# EAGLE board icontroller (EAGLE 5.02)
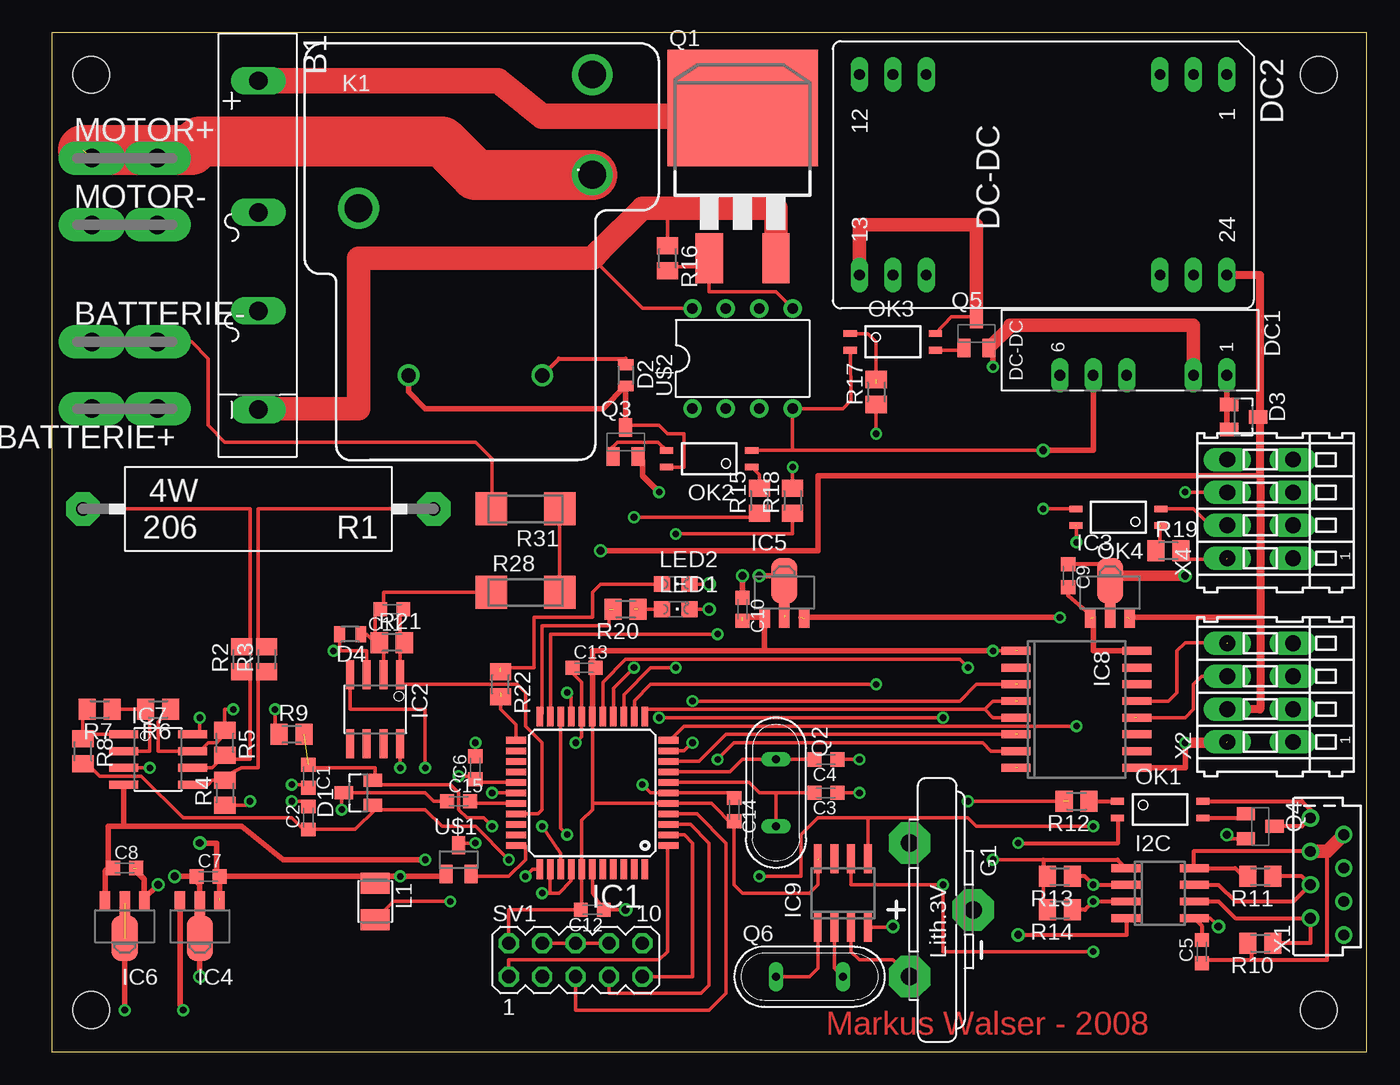
[diagram p0: board, top side]
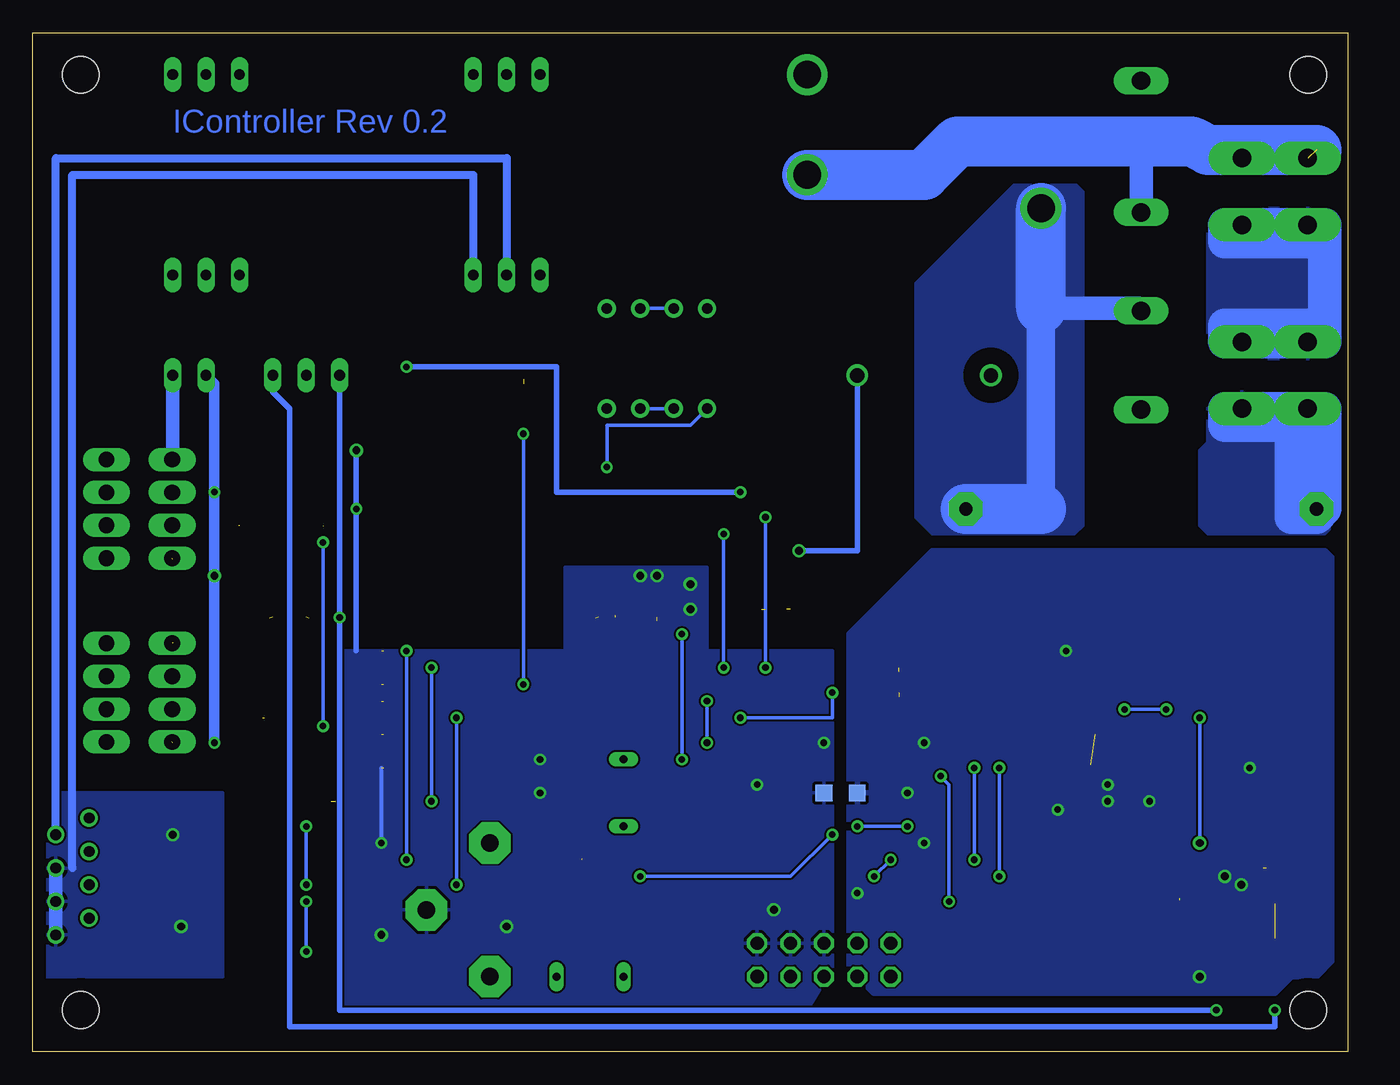
[diagram p1: board, bottom side, seen from below]

Size 100 x 77.46 mm. Coordinates in mm from the lower left corner, seen from the top.
Outline: 0,0 100,0 100,77.46 0,77.46 0,0
Copper layers (1*16): Top 0.035mm / dielectric 1.5mm / Bottom 0.035mm
Design rules "default": minimum track width 10mil, minimum drill 24mil, track to track 6mil, track to pad 6mil, pad to pad 6mil, via to via 6mil, smd to smd 6mil, copper to edge 40mil, drill to drill 8mil, minimum pad ring 10mil, minimum via ring 8mil, stop-mask expansion 4mil, vias tented up to drill 25mil, thermal gap 10mil
Holes 2.8 mm at 96.36,3.17 3.01,3.17 96.36,74.29 3.01,74.29

## Footprints (pad centres in the part's own frame; a part is rotated, then mirrored left to right if it is on the bottom)
FB32 = drill 1.397 long: + -13.5,0; - 11.494,0; AC1 -3.492,0; AC2 4.001,0
F061.100 = drill 1.4 pad 2.54 long: A1 -2.5,0; A2 2.5,0
C0603K = smd 1.05 x 1.08: 1 -0.875,0; 2 0.875,0
SOT23 = smd 1 x 1.4: 1 -0.95,-1.1; 2 0.95,-1.1; 3 0,1.1
MICROMELF-R = smd 0.8 x 1.2: A 0.8,0; C -0.8,0
NMA = drill 0.813 long: 1 0,6.35; 2 0,3.81; 4 0,-1.27; 5 0,-3.81; 6 0,-6.35
DCW = drill 0.813 long: 1 -7.62,13.97; 2 -7.62,11.43; 3 -7.62,8.89; 10 -7.62,-8.89; 11 -7.62,-11.43; 12 -7.62,-13.97; 13 7.62,-13.97; 14 7.62,-11.43; 15 7.62,-8.89; 22 7.62,8.89; 23 7.62,11.43; 24 7.62,13.97
CR2032V = drill 1.321 pad 3.15 octagon: + -2.54,-5.08; +@1 -2.54,5.08; - 2.286,0
SO8 = smd 0.6 x 2.2: 1 -1.905,-2.6; 2 -0.635,-2.6; 3 0.635,-2.6; 4 1.905,-2.6; 5 1.905,2.6; 6 0.635,2.6; 7 -0.635,2.6; 8 -1.905,2.6
TQFP44 = smd 1.5 x 0.5: 1 -5.8,4; 2 -5.8,3.2; 3 -5.8,2.4; 4 -5.8,1.6; 5 -5.8,0.8; 6 -5.8,0; 7 -5.8,-0.8; 8 -5.8,-1.6; 9 -5.8,-2.4; 10 -5.8,-3.2; 11 -5.8,-4; 23 5.8,-4; 24 5.8,-3.2; 25 5.8,-2.4; 26 5.8,-1.6; 27 5.8,-0.8; 28 5.8,0; 29 5.8,0.8; 30 5.8,1.6; 31 5.8,2.4; 32 5.8,3.2; 33 5.8,4 | smd 0.5 x 1.5: 12 -4,-5.8; 13 -3.2,-5.8; 14 -2.4,-5.8; 15 -1.6,-5.8; 16 -0.8,-5.8; 17 0,-5.8; 18 0.8,-5.8; 19 1.6,-5.8; 20 2.4,-5.8; 21 3.2,-5.8; 22 4,-5.8; 34 4,5.8; 35 3.2,5.8; 36 2.4,5.8; 37 1.6,5.8; 38 0.8,5.8; 39 0,5.8; 40 -0.8,5.8; 41 -1.6,5.8; 42 -2.4,5.8; 43 -3.2,5.8; 44 -4,5.8
SO08 = smd 0.61 x 2.21: 1 -1.905,-2.616; 2 -0.635,-2.616; 3 0.635,-2.616; 4 1.905,-2.616; 5 1.905,2.616; 6 0.635,2.616; 7 -0.635,2.616; 8 -1.905,2.616
SOT89 = smd 0.8 x 1.4: 1 -1.499,-1.981; 3 1.499,-1.981 | smd 0.8 x 1.9: 2 0,-1.727 | smd 2 x 3.5: 2.1 0,0.889
SO16W = smd 0.6 x 2.2: 1 -4.445,-4.6; 2 -3.175,-4.6; 3 -1.905,-4.6; 4 -0.635,-4.6; 5 0.635,-4.6; 6 1.905,-4.6; 7 3.175,-4.6; 8 4.445,-4.6; 9 4.445,4.6; 10 3.175,4.6; 11 1.905,4.6; 12 0.635,4.6; 13 -0.635,4.6; 14 -1.905,4.6; 15 -3.175,4.6; 16 -4.445,4.6
SO08' = smd 0.6 x 2.2: 1 -1.905,-2.6; 2 -0.635,-2.6; 3 0.635,-2.6; 4 1.905,-2.6; 5 1.905,2.6; 6 0.635,2.6; 7 -0.635,2.6; 8 -1.905,2.6
JT-PCB = drill 1.1 round: 1 5.08,0; 2 -5.08,0 | drill 2.1 round: C -8.89,12.7; NC 8.89,22.86; NO 8.89,15.24
L3225M = smd 1.6 x 2.2: 1 -1.4,0; 2 1.4,0
CHIPLED_0805 = smd 1.2 x 1.2: A 0,-1.05; C 0,1.05
MINI-FLAT-4 = smd 1 x 0.5: 1 -3.24,0.635; 2 -3.24,-0.635; 3 3.24,-0.635; 4 3.24,0.635
D2PACK = smd 2.083 x 3.81: 1 -2.54,-8.89; 3 2.54,-8.89 | smd 11.43 x 8.89: 2 0,2.54
QS = drill 0.61 long: 1 -2.54,0; 2 2.54,0
SOT23-BEC = smd 1 x 1.4: B -0.95,-1.1; C 0,1.1; E 0.95,-1.1
KH206-8 = drill 1.016 pad 2.54 octagon: 1 -13.335,0; 2 13.335,0
M0805 = smd 1.3 x 1.6: 1 -0.95,0; 2 0.95,0
MINI_MELF-0207W = smd 2.4 x 2.5: 1 -2.6,0; 2 2.6,0
MA05-2 = drill 1.016 octagon: 1 -5.08,-1.27; 2 -5.08,1.27; 3 -2.54,-1.27; 4 -2.54,1.27; 5 0,-1.27; 6 0,1.27; 7 2.54,-1.27; 8 2.54,1.27; 9 5.08,-1.27; 10 5.08,1.27
DIL08 = drill 0.8 pad 1.4 round: 1 -3.81,-3.81; 2 -1.27,-3.81; 3 1.27,-3.81; 4 3.81,-3.81; 5 3.81,3.81; 6 1.27,3.81; 7 -1.27,3.81; 8 -3.81,3.81
FSIDE-8 = drill 0.813 round: 1 -4.445,-1.27; 2 -3.175,1.27; 3 -1.905,-1.27; 4 -0.635,1.27; 5 0.635,-1.27; 6 1.905,1.27; 7 3.175,-1.27; 8 4.445,1.27
233-104 = drill 1.2 long: A1 -3.75,2.5; A2 -1.25,2.5; A3 1.25,2.5; A4 3.75,2.5; B1 -3.75,-2.5; B2 -1.25,-2.5; B3 1.25,-2.5; B4 3.75,-2.5
GND-GNDA = smd 1.27 x 1.27: GND -1.27,0; GNDA 1.27,0

## Placement (x,y rotation side)
B1  RECTIFIER-FB32  [FB32]  15.71,60.32 270 top
BATTERIE+  PIN2F061.100  [F061.100]  5.55,48.89 180 top
BATTERIE-  PIN2F061.100  [F061.100]  5.55,53.97 0 top
C1  100nF  [C0603K]  19.52,20.95 270 top
C2  100nF  [C0603K]  19.52,17.77 90 top
C3  18pF  [C0603K]  58.89,19.68 180 top
C4  18pF  [C0603K]  58.89,22.22 180 top
C5  100nF  [C0603K]  87.47,7.62 90 top
C6  100nF  [C0603K]  32.22,21.58 90 top
C7  100nF  [C0603K]  11.9,13.33 0 top
C8  100nF  [C0603K]  5.55,13.97 0 top
C9  100nF  [C0603K]  77.3,36.19 270 top
C10  100nF  [C0603K]  52.54,33.65 270 top
C11  100nF  [C0603K]  25.87,33.65 180 top
C12  100nF  [C0603K]  41.11,10.79 180 top
C13  100nF  [C0603K]  40.48,29.2 0 top
C14  100nF  [C0603K]  51.91,18.41 270 top
C15  100nF  [C0603K]  30.95,19.04 0 top
D1  BAS40-06  [SOT23]  23.33,19.68 90 top
D2  [MICROMELF-R]  43.65,51.43 270 top
D3  BAS40-06  [SOT23]  90.64,48.26 270 top
D4  [MICROMELF-R]  22.7,31.74 180 top
DC1  [NMA]  83.02,51.43 270 top
DC2  [DCW]  75.4,66.67 270 top
G1  CR2032V  [CR2032V]  67.78,10.79 0 top
I2C  ADUM1250  [SO8]  84.29,12.06 270 top
IC1  MEGA32-A  [TQFP44]  41.11,19.68 180 top
IC2  OPA2336U  [SO08]  24.6,26.03 180 top
IC3  78L05  [SOT89]  80.48,34.92 0 top
IC4  78L05  [SOT89]  11.27,9.52 180 top
IC5  78L05  [SOT89]  55.71,34.92 0 top
IC6  79L05  [SOT89]  5.55,9.52 180 top
IC7  OPA2336U  [SO08]  8.09,22.22 270 top
IC8  ADM2483  [SO16W]  77.94,26.03 270 top
IC9  DS1307  [SO08']  60.16,12.06 0 top
K1  JTN-PCB-DC12V  [JT-PCB]  32.22,51.43 0 top
L1  10uH  [L3225M]  24.6,11.43 270 top
LED1  [CHIPLED_0805]  47.46,33.65 270 top
LED2  [CHIPLED_0805]  47.46,35.55 270 top
MOTOR+  PIN2F061.100  [F061.100]  5.55,67.94 0 top
MOTOR-  PIN2F061.100  [F061.100]  5.55,62.86 0 top
OK1  TLP283  [MINI-FLAT-4]  84.29,18.41 0 top
OK2  TLP283  [MINI-FLAT-4]  50,45.08 180 top
OK3  TLP283  [MINI-FLAT-4]  63.97,53.97 0 top
OK4  TLP283  [MINI-FLAT-4]  81.11,40.64 180 top
Q1  [D2PACK]  52.54,69.21 0 top
Q2  8MHz  [QS]  55.08,19.68 270 top
Q3  BC817-16SMD  [SOT23-BEC]  43.65,46.35 0 top
Q4  BC817-16SMD  [SOT23-BEC]  91.91,17.14 270 top
Q5  BC817-25LT1SMD  [SOT23-BEC]  70.32,54.61 0 top
Q6  32768Hz  [QS]  57.62,5.71 0 top
R1  0.005  [KH206-8]  15.71,41.27 180 top
R2  560  [M0805]  14.44,29.84 90 top
R3  560  [M0805]  16.34,29.84 90 top
R4  10k  [M0805]  13.17,19.68 90 top
R5  10k  [M0805]  13.17,23.49 270 top
R6  10k  [M0805]  8.09,26.03 180 top
R7  10k  [M0805]  3.64,26.03 180 top
R8  10k  [M0805]  2.38,22.86 270 top
R9  10k  [M0805]  18.25,24.12 0 top
R10  100k  [M0805]  91.91,8.25 180 top
R11  100k  [M0805]  91.91,13.33 180 top
R12  390  [M0805]  77.94,19.04 180 top
R13  100k  [M0805]  76.67,13.33 180 top
R14  100k  [M0805]  76.67,10.79 180 top
R15  390  [M0805]  53.81,41.91 90 top
R16  10M  [M0805]  46.82,60.32 270 top
R17  390  [M0805]  62.7,50.16 90 top
R18  220  [M0805]  56.35,41.91 90 top
R19  390  [M0805]  84.92,38.1 0 top
R20  220  [M0805]  43.65,33.65 180 top
R21  6k8  [M0805]  25.87,31.11 0 top
R22  220  [M0805]  34.12,27.93 270 top
R28  560k  [MINI_MELF-0207W]  36.03,34.92 0 top
R31  630k  [MINI_MELF-0207W]  36.03,41.27 180 top
SV1  [MA05-2]  39.84,6.98 0 top
U$1  LM61SOT23  [SOT23]  30.95,14.6 0 top
U$2  PVI1050  [DIL08]  52.54,52.7 0 top
X1  [FSIDE-8]  96.99,13.33 90 top
X2  [233-104]  91.91,27.3 90 top
X4  [233-104]  91.91,41.27 90 top
~NUDEV~1  GND-GNDA  [GND-GNDA]  38.57,19.68 0 bottom

## Library data of the parts
B1 = rectifier
BATTERIE+ BATTERIE- MOTOR+ MOTOR- = con-faston
C1-C15 L1 R2-R22 R28 R31 = rcl
D1-D4 = diode
DC1 DC2 = dc-dc-converter
G1 = battery
I2C = analog-devices
IC1 = atmel
IC2 IC7 = burr-brown
IC3-IC6 IC8 IC9 = icontroller
K1 = relay
LED1 LED2 = led
OK1-OK4 = optocoupler
Q1 = transistor-power
Q2 Q6 = special
Q3-Q5 = transistor-npn
R1 = resistor-power
SV1 = con-lstb
U$1 = linear
U$2 = ir
X1 = con-amp
X2 X4 = con-wago
~NUDEV~1 = supply1

## Nets
+5V: C10.2 C12.2 C13.2 C14.2 I2C.1 IC1.5 IC1.17 IC1.38 IC5.1 IC8.1 IC9.8 R13.2 R14.2 SV1.2
GND: C3.1 C4.1 C10.1 C12.1 C13.1 C14.1 DC1.5 G1.- I2C.4 IC1.6 IC1.18 IC1.39 IC5.2 IC5.2.1 IC8.8 IC9.4 LED1.C LED2.C OK1.2 OK2.2 OK3.2 OK4.3 SV1.4 SV1.6 SV1.8 SV1.10 U$2.4 ~NUDEV~1.GND
GNDA: C1.2 C2.2 C6.2 C7.1 C8.2 C15.1 D1.3 D4.A IC1.28 IC1.35 IC1.37 IC2.3 IC4.2 IC4.2.1 IC6.1 IC7.3 R4.1 U$1.3 ~NUDEV~1.GNDA
GNDIO: C5.2 DC2.15 I2C.5 Q4.E X1.1 X1.3 X1.5
N$1: B1.+ Q1.2
N$2: B1.- Q1.3 R16.1 U$2.8
N$3: B1.AC2 K1.C R1.1 R3.2
N$4: IC7.2 R6.2 R7.1
N$5: IC7.5 R3.1 R4.2
N$6: IC7.6 R2.1 R5.2
N$7: IC7.7 R5.1 R6.1 R9.1
N$8: IC7.1 R7.2 R8.1
N$9: DC1.4 IC6.2 IC6.2.1
N$10: C1.1 D1.2 IC1.36 R9.2
N$11: C2.1 D1.1 IC1.34 R8.2
N$12: C3.2 IC1.7 Q2.2
N$13: C4.2 IC1.8 Q2.1
N$14: I2C.6 R10.1 X1.2
N$15: I2C.7 R11.1 X1.4
N$16: Q1.1 R16.2 U$2.5
N$17: OK1.4 Q4.C X1.8
N$18: OK1.1 R12.1
N$19: IC1.16 R12.2
N$20: OK2.3 Q3.B
N$21: OK2.1 R15.2
N$22: C6.1 IC1.27 L1.2
N$23: I2C.2 IC1.20 IC9.5 R13.1
N$24: I2C.3 IC1.19 IC9.6 R14.1
N$25: IC1.15 R15.1
N$26: D2.C D3.3 DC2.24 IC3.3 K1.1 X2.A2
N$27: C9.1 DC1.2 IC3.2 IC3.2.1 IC8.9 Q3.E Q5.E X2.A1 X4.A3
N$28: D2.A K1.2 OK2.4 Q3.C
N$29: OK1.3 Q4.B
N$30: U$2.6 U$2.7
N$31: IC1.14 R18.1
N$32: R18.2 U$2.1
N$33: U$2.2 U$2.3
N$34: IC1.9 IC8.6
N$35: IC1.10 IC8.3
N$36: IC8.13 X2.A4
N$37: C9.2 IC3.1 IC8.16
N$38: IC8.12 X2.A3
N$39: IC1.12 IC8.4 IC8.5
N$40: IC1.21 IC8.7
N$41: BATTERIE-.A1 MOTOR-.A1 R31.2
N$42: R28.2 R31.1
N$44: DC2.13 OK3.4 Q5.C
N$45: OK3.3 Q5.B
N$46: OK3.1 R17.2
N$47: IC1.13 R17.1
N$48: IC1.11 OK4.4
N$49: OK4.2 X4.A2
N$50: OK4.1 R19.1
N$51: G1.+ IC9.3
N$52: IC1.33 U$1.2
N$53: IC1.3 SV1.7
N$54: IC1.4 SV1.5
N$55: IC1.1 SV1.1
N$56: IC1.2 SV1.9
N$57: DC1.6 IC4.3 IC5.3
N$58: R19.2 X4.A1
N$59: C15.2 IC1.29
N$60: B1.AC1 K1.NO MOTOR+.A1 MOTOR+.A2
N$61: BATTERIE+.A1 R1.2 R2.2
N$62: IC9.1 Q6.1
N$63: IC9.2 Q6.2
N$64: LED2.A R22.1
N$65: IC1.23 R22.2
N$66: IC1.22 R20.2
N$67: C11.2 D4.C IC2.2 R21.1 R28.1
N$68: LED1.A R20.1
N$70: C11.1 IC1.30 IC2.1 R21.2
VCCINT: D3.1 D3.2 DC1.1 X4.A4
VCCIO: C5.1 DC2.14 I2C.8 R10.2 R11.2 X1.6 X1.7
VDD: C7.2 IC2.8 IC4.1 IC7.8 L1.1 U$1.1
VSS: C8.1 IC2.4 IC6.3 IC7.4

## Tracks (layer width: path | path; a pad name or v marks a point on that pad's centre or on a via)
+5V  (via drill 0.5)  (3 unrouted)
  Top 0.254: SV1.2 34.76,10.79 C12.2 39.84,10.79 40.31,11.26 IC1.38 40.31,17.61 41.11,18.41 | R14.2 75.4,11.11 75.4,13.33 | v71.59,14.6 75.4,14.6 | 41.11,29.2 C13.2 | 41.11,18.41 IC1.17 | 41.11,18.41 41.11,18.88 IC1.5 50.16,18.88 51.91,17.14 | 58.25,14.6 58.25,12.7 57.62,12.06 52.54,12.06 51.91,12.7 51.91,17.14 | 51.91,17.14 C14.2 | v71.59,30.47 73.5,30.47
  Top 0.305: I2C.1 81.05,14.6 75.4,14.6 75.4,13.33 R13.2
  Top 0.406: IC1.17 41.11,28.57 | 41.11,28.57 41.11,29.2 | 52.54,33.02 54.14,33.02 IC5.1 54.22,30.47 | 54.22,30.47 v71.59,30.47 | 54.22,30.47 41.11,30.47 41.11,28.57
  Bottom 0.254: v71.59,30.47 v71.59,14.6
GND  (via drill 0.5, 0.6)  (2 unrouted)
  Top 0.254: OK2.2 56.35,45.72 | IC1.39 41.11,12.06 C12.1 v43.65,10.79 | v44.92,20.31 45.55,19.68 46.19,19.68 | 46.19,19.68 IC1.6 | v39.84,23.49 40.31,23.96 IC1.18 40.31,28.1 39.2,29.2 C13.1 | 56.35,45.72 v75.4,45.72 | v75.4,41.27 OK4.3 | 56.35,45.72 U$2.4 60.16,48.89 60.8,49.53 OK3.2 | SV1.4 SV1.6 SV1.8 | IC9.4 63.91,9.46 v63.97,9.52 | C14.1 51.51,19.68 46.19,19.68 | C3.1 v61.43,19.68 | C4.1 v61.43,22.22 | LED1.C v50,33.65 | LED2.C v50,35.55
  Top 0.305: OK1.2 81.11,17.71 81.11,15.87 v73.5,15.87 | v73.5,8.89 81.75,8.89 81.75,10.16 I2C.4
  Top 0.406: DC1.5 79.21,45.72 v75.4,45.72 | C10.1 v52.54,36.19 | v53.81,36.19 55.33,36.19 IC5.2.1 55.71,33.02
  Bottom 0.305: v73.5,15.87 73.5,21.58
  Bottom 0.406: 75.4,30.47 v75.4,41.27 v75.4,45.72
  pour Bottom: 39.2,30.47 39.2,6.34 41.11,3.17 79.21,3.17 79.21,30.47 59.52,30.47 59.52,36.83 48.73,36.83 48.73,30.47
GNDA  (via drill 0.5, 0.6)  (1 unrouted)
  Top 0.254: 19.91,19.68 C1.2 19.28,20.31 v18.25,20.31 | U$1.3 30.95,15.87 v32.22,15.87 | 30.31,19.04 C15.1 29.04,19.04 28.41,19.68 D1.3 22.06,19.68 v22.06,18.41 | D4.A 21.89,30.64 22.06,30.47 | 22.06,30.47 23.96,30.47 IC2.3 23.96,28.57 | IC1.37 39.51,13 38.57,12.06 37.94,12.06 | v37.3,12.06 37.94,12.06 | IC1.35 37.91,12.09 37.94,12.06 | R4.1 14.76,18.73 v15.08,19.04 | IC7.3 v7.46,21.58 | v21.42,30.47 22.06,30.47 | C2.2 19.12,19.04 v18.25,19.04 | C6.2 v32.22,23.49 | IC1.28 v33.49,19.68 IC1.28
  Top 0.406: v11.27,5.71 IC4.2.1 | IC6.1 7.05,11.65 | 7.05,11.65 v8.09,12.7 | 10.63,13.33 v9.36,13.33 | 10.63,13.33 C7.1 | IC4.2 11.27,12.7 10.63,13.33 | 7.05,11.65 7.05,13.1 6.18,13.97
  pour Bottom (rank 2): 37.94,22.22 37.94,31.74 31.58,38.1 1.74,38.1 1.1,37.46 1.1,6.98 2.38,5.71 4.28,5.71 5.55,4.44 36.03,4.44 37.3,5.71 37.94,6.34
GNDIO  (via drill 0.6)
  Top 0.254: Q4.E 89.69,16.19 v89.37,16.5 | I2C.5 88.1,10.16 v88.73,9.52
  Top 0.305: 90.64,16.5 90.64,16.36 Q4.E | 87.47,8.25 C5.2 87.47,9.58 I2C.5 86.19,10.16
  Bottom 0.61: DC2.15 66.51,66.67 96.99,66.67 96.99,13.97
  Bottom 1.016: X1.1 X1.3 X1.5
  pour Bottom: 85.56,5.71 85.56,19.68 99.53,19.68 99.53,5.71
N$1
  Top 1.778: Q1.2 51.27,70.48 50,71.11
  Top 1.93: B1.+ 33.96,73.82 37.3,71.11 37.94,71.11 50,71.11
N$2
  Top 0.254: 46.82,64.13 R16.1 | 41.74,60.96 41.74,60.79 | U$2.8 44.92,56.51 41.11,60.32
  Top 1.778: Q1.3 55.08,64.13 46.82,64.13 44.92,64.13 41.74,60.96 41.11,60.32 23.33,60.32 23.33,48.89 15.71,48.89 B1.-
N$3
  Top 0.254: R1.1 15.71,41.27 15.71,31.11 16.98,30.47 R3.2
  Bottom 1.778: B1.AC2 15.9,56.51 23.33,56.51
  Bottom 2.184: 23.33,41.27 23.33,56.51
  Bottom 3.81: R1.1 23.33,41.27 | 23.33,56.51 K1.C
  pour Bottom (isolate 1.27): 20.79,66.03 25.23,66.03 32.85,58.41 32.85,40.64 31.58,39.37 20.79,39.37 20.15,40 20.15,65.4
N$4
  Top 0.254: IC7.2 7.46,22.86 7.46,25.71 R6.2 R7.1 4.28,26.03
N$5
  Top 0.254: 10.63,20.31 IC7.5 11.9,20.31 12.21,20.63 R4.2 13.17,20.95 14.44,21.58 15.71,21.58 15.71,28.89 R3.1
N$6
  Top 0.254: 10.63,21.58 IC7.6 12.21,21.58 R5.2 13.17,22.22 15.08,22.22 15.08,28.25 R2.1
N$7  (via drill 0.5)
  Top 0.254: R6.1 8.09,25.08 8.09,22.86 10.63,22.86 | 13.17,24.12 R5.1 | 13.17,24.12 12.54,23.49 11.9,23.49 11.27,22.86 10.63,22.86 | 10.63,22.86 IC7.7 | 13.17,24.12 13.17,26.03 v13.81,26.03 | R9.1 16.98,24.45 v16.98,26.03
  Bottom 0.254: v13.81,26.03 v16.98,26.03
N$8
  Top 0.254: 2.38,24.12 IC7.1 | R8.1 2.38,24.12 | R7.2 2.38,25.71 2.38,24.12
N$9  (via drill 0.5)  (1 unrouted)
  Top 0.406: v5.55,3.17 IC6.2
  Bottom 0.406: DC1.4 81.75,50.16 80.48,48.89 80.48,1.9 5.55,1.9 v5.55,3.17
N$10  (via drill 0.5)  (1 unrouted)
  Top 0.254: C1.1 19.76,21.58 24.6,21.58 24.6,20.8 D1.2 24.43,20.48 24.6,20.31 30.31,20.31 30.95,19.68 30.95,18.41 31.58,17.77 32.85,17.77 v33.49,17.14 | IC1.36 38.71,15.1 v37.3,17.14
  Bottom 0.254: v33.49,17.14 v37.3,17.14
N$11  (via drill 0.5)
  Top 0.254: R8.2 2.69,21.9 3.64,20.95 6.82,20.95 10,17.77 18.25,17.77 19.52,16.5 C2.1 23.09,16.9 24.6,18.41 | 24.6,18.41 24.43,18.58 D1.1 | 24.6,18.41 28.41,18.41 29.68,17.14 32.22,17.14 v34.76,14.6 | IC1.34 36.58,13.88 v36.03,13.33
  Bottom 0.254: v34.76,14.6 v36.03,13.33
N$12
  Top 0.254: IC1.7 53.01,20.48 53.81,19.68 55.08,19.68 | 55.08,19.68 C3.2 | 55.08,19.68 Q2.2
N$13
  Top 0.254: C4.2 Q2.1 52.54,22.22 51.6,21.28 IC1.8
N$14
  Top 0.305: R10.1 95.72,8.25 X1.2 90,10.16 88.73,11.43 I2C.6
N$15
  Top 0.305: R11.1 95.08,13.33 X1.4 94.45,11.43 90,11.43 88.73,12.7 I2C.7
N$16
  Top 0.254: R16.2 46.82,59.69 49.37,59.69 Q1.1 50,57.78 55.08,57.78 U$2.5
N$17
  Top 0.305: Q4.C 95.08,17.14 X1.8 95.72,18.41 95.08,19.04 OK1.4 | OK1.4 87.47,19.11 87.47,19.04 OK1.4
N$18
  Top 0.305: 78.58,19.04 R12.1 OK1.1
N$19  (via drill 0.5)  (1 unrouted)
  Top 0.254: IC1.16 41.91,28.1 43.65,29.84 69.05,29.84 v69.69,29.2 | v69.69,19.04 77.3,19.04
  Bottom 0.254: v69.69,29.2 v69.69,19.04
N$20
  Top 0.254: OK2.3 46.12,46.35 43.02,46.35 42.38,45.72 42.38,45.08 42.53,45.08 Q3.B
N$21
  Top 0.254: OK2.1 53.81,43.88 R15.2
N$22  (via drill 0.5)
  Top 0.254: IC1.27 32.38,20.48 32.22,20.31 C6.1 32.22,20.95 v30.95,20.95 | L1.2 26,11.43 v30.31,11.43
  Bottom 0.254: v30.31,11.43 30.31,20.31 v30.95,20.95
N$23  (via drill 0.5)
  Top 0.254: IC1.20 38.71,17 v39.2,16.5 | v79.21,17.14 70.32,17.14 69.69,17.77 62.06,17.77 | v53.81,13.33 56.98,13.33 56.98,16.5 58.25,17.77 62.06,17.77 | 62.06,17.77 IC9.5
  Top 0.305: I2C.2 v79.21,12.7 78.58,13.33 R13.1
  Bottom 0.254: v39.2,16.5 42.38,13.33 v53.81,13.33 | v79.21,17.14 v79.21,12.7
N$24  (via drill 0.5, 0.5 pad 0.25)
  Top 0.254: IC1.19 39.51,26.99 v39.2,27.3 | v46.19,25.39 v67.78,25.39 | v79.21,7.62 67.78,7.62 v67.78,12.7 60.8,12.7 IC9.6
  Top 0.305: 81.75,11.43 I2C.3 v79.21,11.43 78.58,10.79 R14.1
  Bottom 0.254: v39.2,27.3 39.2,25.39 v46.19,25.39 | v67.78,25.39 v67.78,12.7 | v79.21,7.62 v79.21,11.43
N$25  (via drill 0.5)
  Top 0.254: IC1.15 42.71,27.63 v44.28,29.2 | R15.1 53.81,40.64 v44.28,40.64
  Bottom 0.254: v44.28,29.2 v44.28,40.64
N$26  (via drill 0.6)  (1 unrouted)
  Top 0.254: 43.65,52.7 D2.C | 89.43,26.03 X2.A2
  Top 0.305: K1.1 38.57,52.7 43.65,52.7
  Top 0.406: v41.74,38.1 58.25,38.1 58.25,43.81 91.91,43.81 | 91.91,48.26 D3.3 91.91,48.43 | 91.91,33.02 81.75,33.02
  Top 0.61: 89.43,26.03 91.91,26.03 91.91,33.02 91.91,43.81 91.91,48.26 | 91.91,48.43 91.91,59.05 DC2.24
  Bottom 0.406: K1.1 37.3,38.1 v41.74,38.1
N$27  (via drill 0.5, 0.6)  (1 unrouted)
  Top 0.254: 71.59,53.19 Q5.E | Q3.E 44.92,44.93 | X4.A3 86.22,42.52 v86.19,42.54 | IC3.2.1 80.86,36.19 81.75,36.19 | 80.48,36.19 IC3.2
  Top 0.305: C9.1 80.48,37.07 80.48,36.19
  Top 0.406: v71.59,52.07 71.59,53.19 | 44.92,44.93 44.92,43.81 v46.19,42.54 | IC8.9 86.19,21.58 v86.19,23.49
  Top 0.813: v86.19,23.49 89.37,23.49 | v86.19,36.19 81.75,36.19 80.48,36.19
  Top 1.016: Q5.E 72.86,55.1 72.86,55.24 86.83,55.24 DC1.2
  Bottom 0.406: v46.19,42.54 60.16,42.54 60.16,52.07 v71.59,52.07
  Bottom 0.813: v86.19,23.49 v86.19,36.19 v86.19,42.54 86.19,50.8 DC1.2
N$28
  Top 0.254: Q3.C 43.82,47.62 46.19,47.62 46.82,46.98 48.09,46.98 48.09,44.45 OK2.4
  Top 0.406: K1.2 27.14,50.16 28.41,48.89 41.91,48.89 D2.A Q3.C
N$29
  Top 0.305: Q4.B 90.5,17.77 OK1.3 87.47,17.77
N$30
  Bottom 0.254: U$2.7 U$2.6
N$31  (via drill 0.5)
  Top 0.254: IC1.14 43.51,27.16 45.55,29.2 v47.46,29.2 | 56.35,40.64 R18.1 56.35,39.37 v47.46,39.37
  Bottom 0.254: v47.46,29.2 v47.46,39.37
N$32  (via drill 0.5)
  Top 0.254: v56.35,44.45 R18.2
  Bottom 0.254: U$2.1 50,47.62 56.35,47.62 v56.35,44.45
N$33
  Bottom 0.254: U$2.2 U$2.3
N$34  (1 unrouted)
  Top 0.254: IC1.9 49.23,22.08 51.27,24.12 73.5,24.12
N$35  (via drill 0.5)  (1 unrouted)
  Top 0.254: IC1.10 48.07,22.88 v48.73,23.49 | v48.73,26.66 69.05,26.66 70.32,27.93 73.5,27.93
  Bottom 0.254: v48.73,23.49 v48.73,26.66
N$36  (1 unrouted)
  Top 0.254: IC8.13 84.92,26.66 85.56,27.3 85.56,30.47 86.19,31.11 89.37,31.11
N$37  (1 unrouted)
  Top 0.305: C9.2 77.3,34.68 79.21,33.02
  Top 0.406: IC8.16 80.48,30.47 79.21,30.47 79.21,33.02
N$38  (1 unrouted)
  Top 0.254: X2.A3 87.48,28.55 86.83,27.93 86.83,26.03 86.19,25.39 82.39,25.39
N$39  (1 unrouted)
  Top 0.254: 73.5,25.39 IC8.5 71.59,25.39 70.95,26.03 | 46.19,26.03 45.55,26.03 | 46.19,26.03 70.95,26.03 | IC1.12 45.11,26.03 46.19,26.03 | 70.95,26.03 71.59,26.66 72.86,26.66 73.5,26.66
N$40  (via drill 0.5 pad 0.25)
  Top 0.254: IC8.7 71.59,22.86 71.44,22.86 70.8,23.49 51.91,23.49 v50.63,22.22 | IC1.21 37.94,25.5 37.94,31.74 v50.63,31.74
  Bottom 0.254: v50.63,31.74 v50.63,22.22
N$41  (via drill 0.5)
  Top 0.254: R31.2 33.49,42.48 33.49,45.08 32.22,46.35 13.17,46.35 11.9,47.62 11.9,52.7 10.63,53.97 v8.09,53.97 BATTERIE-.A1 3.01,53.97
  Bottom 2.54: BATTERIE-.A1 v8.09,53.97 | 8.09,62.82 MOTOR-.A1 1.74,62.86 | 1.74,61.59 1.74,62.86 | 1.74,55.24 1.74,53.97 9.36,53.97 9.36,55.24 1.74,55.24 | 1.74,55.24 1.74,61.59 | 1.74,61.59 9.36,61.59 9.36,62.86 1.74,62.86
  pour Bottom: 0.47,62.86 0.47,63.5 1.1,64.13 10,64.13 10.63,63.5 10.63,54.61 10.63,53.34 10,52.7 1.1,52.7 0.47,53.34
N$42
  Top 0.254: R28.2 38.57,34.92 38.63,34.98 R31.1
N$43  (via drill 0.5)
  other vias: 11.27,15.87
N$44
  Top 0.254: OK3.4 68.41,55.88 70.32,55.88
  Top 1.016: DC2.13 61.43,62.86 70.32,62.86 70.32,55.88 Q5.C
N$45
  Top 0.254: 69.54,53.34 69.69,53.34 | 69.54,53.34 Q5.B | OK3.3 69.54,53.34
N$46  (1 unrouted)
  Top 0.254: OK3.1 62.06,54.61 62.7,53.97 62.7,50.8
N$47  (via drill 0.5)
  Top 0.254: IC1.13 44.31,26.69 45.55,27.93 v62.7,27.93 | v62.7,46.98 R17.1
  Bottom 0.254: v62.7,27.93 v62.7,46.98
N$48  (via drill 0.5)  (1 unrouted)
  Top 0.254: IC1.11 47.02,23.68 48.09,24.76 v77.94,24.76 | v77.94,38.73 77.94,40
  Bottom 0.254: v77.94,24.76 v77.94,38.73
N$49
  Top 0.254: X4.A2 89.39,40.02 89.37,40 88.1,40 86.83,41.27 OK4.2
N$50  (1 unrouted)
  Top 0.254: R19.1 84.29,38.1 84.29,40
N$51
  Top 0.254: IC9.3 60.8,7.62 61.43,6.98 63.97,6.98 G1.+
N$52
  Top 0.254: 32.07,13.33 34.76,13.33 36.03,14.6 36.03,15.68 35.39,15.68
  Top 0.406: 35.39,15.68 IC1.33 | U$1.2 32.07,13.33
N$53
  Top 0.254: IC1.3 48.59,17.28 50,15.87 50,5.08 49.37,4.44 42.38,4.44 SV1.7
N$54
  Top 0.254: IC1.4 49.06,18.08 51.27,15.87 51.27,4.44 50,3.17 39.84,3.17 SV1.5
N$55
  Top 0.254: IC1.1 46.82,15.6 46.82,7.62 46.19,6.98 34.76,6.98 SV1.1
N$56
  Top 0.254: IC1.2 48.12,16.48 48.73,15.87 48.73,5.71 SV1.9
N$57  (via drill 0.5)  (1 unrouted)
  Top 0.406: IC4.3 9.77,3.58 v10,3.17 | v76.67,33.02 56.98,33.02
  Bottom 0.406: DC1.6 v76.67,33.02 76.67,3.17 v10,3.17
N$58  (1 unrouted)
  Top 0.254: R19.2 86.51,37.46 89.37,37.46
N$59
  Top 0.254: C15.2 31.58,19.04 31.75,18.88 IC1.29
N$60  (1 unrouted)
  Top 3.81: K1.NO 32.22,66.67 29.68,69.21 11.27,69.21 10.63,68.57 2.38,68.57
  Bottom 1.016: 15.71,69.21 15.71,67.94
  Bottom 1.778: 8.09,67.94 MOTOR+.A2 | 15.71,67.94 B1.AC1
  Bottom 2.54: MOTOR+.A1 8.09,67.94
  Bottom 3.81: K1.NO 32.22,66.67 29.68,69.21 15.71,69.21 11.9,69.21 10.63,68.57 2.38,68.57
N$61
  Top 0.254: R1.2 15.08,41.27 15.08,30.47 14.44,30.47 R2.2
  Bottom 2.54: R1.2 2.38,48.89 9.36,48.89 9.36,47.62 4.92,47.62 4.28,46.98 4.28,40.64 2.38,40.64 1.74,41.27 1.74,48.89
  pour Bottom (isolate 1.27): 1.74,50.16 10,50.16 10.63,49.53 10.63,46.35 11.27,45.72 11.27,40 10.63,39.37 1.74,39.37 0.47,40.64 0.47,49.53 1.1,50.16
N$62
  Top 0.254: IC9.1 58.25,6.34 57.62,5.71 Q6.1
N$63
  Top 0.254: IC9.2 59.52,6.34 Q6.2
N$64  (1 unrouted)
  Top 0.254: LED2.A 41.74,35.55 41.11,34.92 41.11,33.02 36.66,33.02 36.66,29.2 34.12,29.2 34.12,28.57
N$65  (1 unrouted)
  Top 0.254: IC1.23 35.31,24.84 34.12,26.03 34.12,27.3
N$66  (1 unrouted)
  Top 0.254: IC1.22 37.3,25.67 37.3,32.38 42.38,32.38 42.38,33.65 43.02,33.65
N$67
  Top 0.254: R28.1 25.23,34.92 25.23,33.65 C11.2 24.6,33.26 24.6,31.11 | 24.6,31.11 R21.1 25.23,30.79 IC2.2 25.23,28.57 | 23.33,31.74 D4.C 23.96,31.74 24.6,31.11
N$68  (1 unrouted)
  Top 0.254: 44.28,33.65 LED1.A
N$70
  Top 0.254: C11.1 26.5,33.41 26.5,31.11 R21.2 26.5,30.79 IC2.1 26.5,27.93 35.39,27.93 36.03,27.3 36.03,24.76 37.3,23.49 37.3,18.41 36.97,18.08 IC1.30
VCCINT
  Top 0.406: D3.2 89.37,47.48 89.37,49.04 | X4.A4 89.37,45.06 | 89.37,49.04 D3.1 | DC1.1 89.37,49.04
  Bottom 1.016: X4.A4 89.41,45.04 89.37,45.08 DC1.1
VCCIO
  Top 0.305: C5.1 87.7,6.98 91.28,6.98 | R10.2 91.28,8.25 91.28,6.98 | 91.28,13.33 R11.2 90.64,13.33 90,13.97 I2C.8 86.83,13.97 86.83,15.24 X1.6 | 96.99,15.24 96.99,6.98 91.28,6.98
  Top 1.016: X1.7 96.99,15.24 X1.6
  Bottom 0.61: DC2.14 63.97,67.94 98.26,67.94 X1.7
VDD  (via drill 0.5, 0.6)  (1 unrouted)
  Top 0.254: v11.27,25.39 11.27,24.12 IC7.8 10.63,24.12 | v26.5,21.58 IC2.8 | 24.6,13.33 L1.1
  Top 0.406: U$1.1 29.83,13.33 v26.5,13.33 24.6,13.33 C7.2 | C7.2 12.54,13.33 12.54,15.87 v11.27,15.87 | C7.2 12.78,11.67 12.54,11.43
  Bottom 0.254: v11.27,15.87 v11.27,25.39 | v26.5,13.33 v26.5,21.58
VSS  (via drill 0.5)
  Top 0.254: 5.47,17.14 5.55,17.14 5.47,17.22 | IC2.4 22.7,26.03 28.41,26.03 v28.41,21.58
  Top 0.406: v28.41,14.6 17.61,14.6 14.44,17.14 5.55,17.14 4.28,17.14 4.28,13.97 | 5.47,17.22 IC7.4 | 4.28,13.97 C8.1 | IC6.3 4.05,13.74 4.28,13.97
  Bottom 0.254: v28.41,14.6 v28.41,21.58

## Text on the board
Top: Markus Walser - 2008
Bottom: IController Rev 0.2